# EAGLE board CT_schematic (EAGLE 7.6.0)

Size 100 x 80 mm. Coordinates in mm from the lower left corner, seen from the top.
Outline: 0,0 100,0 100,80 0,80 0,0
Copper layers (1*16): Top 0.035mm / dielectric 1.5mm / Bottom 0.035mm
Design rules "default": minimum track width 10mil, minimum drill 24mil, track to track 8mil, track to pad 8mil, pad to pad 8mil, via to via 8mil, smd to smd 8mil, copper to edge 40mil, drill to drill 8mil, minimum pad ring 10mil, minimum via ring 8mil, stop-mask expansion 4mil, vias tented up to drill 0mil, thermal gap 10mil

## Footprints (pad centres in the part's own frame; a part is rotated, then mirrored left to right if it is on the bottom)
C0603 = smd 0.8 x 0.8: 1 -0.762,0; 2 0.762,0
C0402 = smd 0.5 x 0.5: 1 -0.508,0; 2 0.508,0
C0805 = smd 1.2 x 1.3: 1 -1.016,0; 2 1.016,0
C1206 = smd 1.3 x 1.6: 1 -1.524,0; 2 1.524,0
C1210 = smd 1.2 x 2.5: 1 -1.524,0; 2 1.524,0
EXV-9H = smd 3.505 x 1.676: 1 -2.857,0; 2 2.857,0
L0603 = smd 0.8 x 0.8: 1 -0.762,0; 2 0.762,0
PJ-037B_PACKAGE = drill 3.7 square: 1 12,0 | drill 3.2 square: 2 6,0
R0603 = smd 0.8 x 0.8: 1 -0.762,0; 2 0.762,0
UFBGA169 = smd 0.35 x 0.35: A1 -3.9,3.9; A2 -3.25,3.9; A3 -2.6,3.9; A4 -1.95,3.9; A5 -1.3,3.9; A6 -0.65,3.9; A7 0,3.9; A8 0.65,3.9; A9 1.3,3.9; A10 1.95,3.9; A11 2.6,3.9; A12 3.25,3.9; A13 3.9,3.9; B1 -3.9,3.25; B2 -3.25,3.25; B3 -2.6,3.25; B4 -1.95,3.25; B5 -1.3,3.25; B6 -0.65,3.25; B7 0,3.25; B8 0.65,3.25; B9 1.3,3.25; B10 1.95,3.25; B11 2.6,3.25; B12 3.25,3.25; B13 3.9,3.25; C1 -3.9,2.6; C2 -3.25,2.6; C3 -2.6,2.6; C4 -1.95,2.6; C5 -1.3,2.6; C6 -0.65,2.6; C7 0,2.6; C8 0.65,2.6; C9 1.3,2.6; C10 1.95,2.6; C11 2.6,2.6; C12 3.25,2.6; C13 3.9,2.6; D1 -3.9,1.95; D2 -3.25,1.95; D3 -2.6,1.95; D4 -1.95,1.95; D5 -1.3,1.95; D6 -0.65,1.95; D7 0,1.95; D8 0.65,1.95; D9 1.3,1.95; D10 1.95,1.95; D11 2.6,1.95; D12 3.25,1.95; D13 3.9,1.95; E1 -3.9,1.3; E2 -3.25,1.3; E3 -2.6,1.3; E4 -1.95,1.3; E5 -1.3,1.3; E6 -0.65,1.3; E7 0,1.3; E8 0.65,1.3; E9 1.3,1.3; E10 1.95,1.3; E11 2.6,1.3; E12 3.25,1.3; E13 3.9,1.3; F1 -3.9,0.65; F2 -3.25,0.65; F3 -2.6,0.65; F4 -1.95,0.65; F5 -1.3,0.65; F6 -0.65,0.65; F7 0,0.65; F8 0.65,0.65; F9 1.3,0.65; F10 1.95,0.65; F11 2.6,0.65; F12 3.25,0.65; F13 3.9,0.65; G1 -3.9,0; G2 -3.25,0; G3 -2.6,0; G4 -1.95,0; G5 -1.3,0; G6 -0.65,0; G7 0,0; G8 0.65,0; G9 1.3,0; G10 1.95,0; G11 2.6,0; G12 3.25,0; G13 3.9,0; H1 -3.9,-0.65; H2 -3.25,-0.65; H3 -2.6,-0.65; H4 -1.95,-0.65; H5 -1.3,-0.65; H6 -0.65,-0.65; H7 0,-0.65; H8 0.65,-0.65; H9 1.3,-0.65; H10 1.95,-0.65; H11 2.6,-0.65; H12 3.25,-0.65; H13 3.9,-0.65; J1 -3.9,-1.3; J2 -3.25,-1.3; J3 -2.6,-1.3; J4 -1.95,-1.3; J5 -1.3,-1.3; J6 -0.65,-1.3; J7 0,-1.3; J8 0.65,-1.3; J9 1.3,-1.3; J10 1.95,-1.3; J11 2.6,-1.3; J12 3.25,-1.3; J13 3.9,-1.3; K1 -3.9,-1.95; K2 -3.25,-1.95; K3 -2.6,-1.95; K4 -1.95,-1.95; K5 -1.3,-1.95; K6 -0.65,-1.95; K7 0,-1.95; K8 0.65,-1.95; K9 1.3,-1.95; K10 1.95,-1.95; K11 2.6,-1.95; K12 3.25,-1.95; K13 3.9,-1.95; L1 -3.9,-2.6; L2 -3.25,-2.6; L3 -2.6,-2.6; L4 -1.95,-2.6; L5 -1.3,-2.6; L6 -0.65,-2.6; L7 0,-2.6; L8 0.65,-2.6; L9 1.3,-2.6; L10 1.95,-2.6; L11 2.6,-2.6; L12 3.25,-2.6; L13 3.9,-2.6; M1 -3.9,-3.25; M2 -3.25,-3.25; M3 -2.6,-3.25; M4 -1.95,-3.25; M5 -1.3,-3.25; M6 -0.65,-3.25; M7 0,-3.25; M8 0.65,-3.25; M9 1.3,-3.25; M10 1.95,-3.25; M11 2.6,-3.25; M12 3.25,-3.25; M13 3.9,-3.25; N1 -3.9,-3.9; N2 -3.25,-3.9; N3 -2.6,-3.9; N4 -1.95,-3.9; N5 -1.3,-3.9; N6 -0.65,-3.9; N7 0,-3.9; N8 0.65,-3.9; N9 1.3,-3.9; N10 1.95,-3.9; N11 2.6,-3.9; N12 3.25,-3.9; N13 3.9,-3.9
VFBGA48 = smd 0.35 x 0.35: A1 -1.875,2.625; A2 -1.125,2.625; A3 -0.375,2.625; A4 0.375,2.625; A5 1.125,2.625; A6 1.875,2.625; B1 -1.875,1.875; B2 -1.125,1.875; B3 -0.375,1.875; B4 0.375,1.875; B5 1.125,1.875; B6 1.875,1.875; C1 -1.875,1.125; C2 -1.125,1.125; C3 -0.375,1.125; C4 0.375,1.125; C5 1.125,1.125; C6 1.875,1.125; D1 -1.875,0.375; D2 -1.125,0.375; D3 -0.375,0.375; D4 0.375,0.375; D5 1.125,0.375; D6 1.875,0.375; E1 -1.875,-0.375; E2 -1.125,-0.375; E3 -0.375,-0.375; E4 0.375,-0.375; E5 1.125,-0.375; E6 1.875,-0.375; F1 -1.875,-1.125; F2 -1.125,-1.125; F3 -0.375,-1.125; F4 0.375,-1.125; F5 1.125,-1.125; F6 1.875,-1.125; G1 -1.875,-1.875; G2 -1.125,-1.875; G3 -0.375,-1.875; G4 0.375,-1.875; G5 1.125,-1.875; G6 1.875,-1.875; H1 -1.875,-2.625; H2 -1.125,-2.625; H3 -0.375,-2.625; H4 0.375,-2.625; H5 1.125,-2.625; H6 1.875,-2.625
SOT-23-8 = smd 0.4 x 1.2: 1 -0.975,-1.3; 2 -0.325,-1.3; 3 0.325,-1.3; 4 0.975,-1.3; 5 0.975,1.3; 6 0.325,1.3; 7 -0.325,1.3; 8 -0.975,1.3
182-009-MALE = drill 1.194 pad 1.524 octagon: 1 -5.537,10.923; 2 -2.769,10.923; 3 0,10.923; 4 2.769,10.923; 5 5.537,10.923; 6 -4.153,8.08; 7 -1.384,8.08; 8 1.384,8.08; 9 4.153,8.08 | hole 3.048: -12.446,9.501; 12.446,9.501
SOIC-8 = smd 1.6 x 0.6: 1 -2.7,1.905 | smd 1.55 x 0.6: 2 -2.7,0.635; 3 -2.7,-0.635; 4 -2.7,-1.905; 5 2.7,-1.905; 6 2.7,-0.635; 7 2.7,0.635; 8 2.7,1.905
MOLEX_47219-2001 = smd 0.8 x 1.5: 1 3.2,-2.1; 2 2.1,-2.1; 3 1,-2.1; 4 -0.1,-2.1; 5 -1.2,-2.1; 6 -2.3,-2.1; 7 -3.4,-2.1; 8 -4.5,-2.1 | smd 1.5 x 2.05: G1 6.875,-4.7; G2 6.875,3.6; G3 -6.875,3.6; G4 -6.875,-4.7
ASEK = smd 1.4 x 1: 1 -1.1,-0.8; 2 1.1,-0.8; 3 1.1,0.8; 4 -1.1,0.8
ASFL1 = smd 1.7 x 1.5: 1 -1.27,-1.1; 2 1.27,-1.1; 3 1.27,1.1; 4 -1.27,1.1
WSON-8 = smd 0.3 x 0.6: 1 -0.75,0; 2 0.05,0; 3 0.85,0; 4 1.65,0; 5 1.65,3.8; 6 0.85,3.8; 7 0.05,3.8; 8 -0.75,3.8 | smd 3 x 2.6: PAD 0.45,1.9
SON-6 = smd 0.55 x 0.3: 1 -0.355,0.5 | smd 0.52 x 0.3: 2 -0.37,0; 3 -0.37,-0.5; 4 0.37,-0.5; 5 0.37,0; 6 0.37,0.5
SW_4-1437565-2 = smd 1.4 x 2.1: 1 -2.23,4.55; 2 -2.23,-4.55; 3 2.23,4.55; 4 2.23,-4.55
LGM67K-G1J2-24-Z = smd 0.8 x 1.4: A -2,0; C 0,0
NC7SZ125M5X = smd 1.3 x 0.7: 1 -1.3,0.95; 2 -1.3,0; 3 -1.3,-0.95; 4 1.3,-0.95; 5 1.3,0.95
DUMMY_PACKAGE_186 = drill 0.3: 1 0,-1; 2 1.5,-1; 3 3,-1

## Placement (x,y rotation side)
C1  1e-06  [C0603]  -74.93,85.09 0 top  (outside the outline)
C2  1e-07  [C0603]  -78.74,85.09 0 top  (outside the outline)
C3  1e-07  [C0603]  -82.55,85.09 0 top  (outside the outline)
C4  1e-07  [C0603]  -15.24,90.17 0 top  (outside the outline)
C5  1e-07  [C0603]  -19.05,90.17 0 top  (outside the outline)
C6  1e-07  [C0603]  -22.86,90.17 0 top  (outside the outline)
C7  1e-07  [C0603]  -26.67,90.17 0 top  (outside the outline)
C8  1e-07  [C0603]  -30.48,90.17 0 top  (outside the outline)
C9  1e-07  [C0603]  -34.29,90.17 0 top  (outside the outline)
C10  1e-07  [C0603]  -38.1,90.17 0 top  (outside the outline)
C11  1e-07  [C0603]  -41.91,90.17 0 top  (outside the outline)
C12  1e-07  [C0603]  -45.72,90.17 0 top  (outside the outline)
C13  1e-07  [C0603]  -49.53,90.17 0 top  (outside the outline)
C14  1e-07  [C0603]  -53.34,90.17 0 top  (outside the outline)
C15  1e-07  [C0603]  -57.15,90.17 0 top  (outside the outline)
C16  1e-07  [C0603]  -60.96,90.17 0 top  (outside the outline)
C17  4.7e-06  [C0603]  -59.69,85.09 0 top  (outside the outline)
C18  2.2e-06  [C0603]  -63.5,85.09 0 top  (outside the outline)
C19  2.2e-06  [C0603]  -67.31,85.09 0 top  (outside the outline)
C20  1e-08  [C0603]  -64.77,90.17 0 top  (outside the outline)
C21  1e-06  [C0603]  -68.58,90.17 0 top  (outside the outline)
C22  1e-07  [C0603]  -72.39,90.17 0 top  (outside the outline)
C23  1e-07  [C0402]  -45.72,95.25 0 top  (outside the outline)
C24  2.2e-06  [C0603]  -71.12,85.09 0 top  (outside the outline)
C25  1e-07  [C0402]  -49.53,95.25 0 top  (outside the outline)
C26  1e-06  [C0603]  -76.2,90.17 0 top  (outside the outline)
C27  1e-06  [C0603]  -80.01,90.17 0 top  (outside the outline)
C28  1e-07  [C0402]  -53.34,95.25 0 top  (outside the outline)
C29  1e-05  [C0805]  -26.67,78.74 0 top  (outside the outline)
C30  1e-08  [C0402]  -57.15,95.25 0 top  (outside the outline)
C31  1e-08  [C0402]  -60.96,95.25 0 top  (outside the outline)
C32  1e-08  [C0402]  -64.77,95.25 0 top  (outside the outline)
C33  1e-05  [C1206]  -83.82,71.12 0 top  (outside the outline)
C34  1e-05  [C1210]  -71.12,71.12 0 top  (outside the outline)
C35  1e-06  [C0603]  -83.82,90.17 0 top  (outside the outline)
C36  1e-05  [C1210]  -77.47,71.12 0 top  (outside the outline)
C37  1e-07  [C0402]  -68.58,95.25 0 top  (outside the outline)
C38  0.0001  [EXV-9H]  -38.1,72.39 0 top  (outside the outline)
C39  0.0001  [EXV-9H]  -49.53,72.39 0 top  (outside the outline)
C40  1e-08  [C0402]  -72.39,95.25 0 top  (outside the outline)
F1  240.0  [L0603]  -15.24,95.25 0 top  (outside the outline)
J1  PJ-037B  [PJ-037B_PACKAGE]  -43.18,50.8 0 top  (outside the outline)
R2  1000.0  [R0603]  -19.05,95.25 0 top  (outside the outline)
R4  4700.0  [R0603]  -22.86,95.25 0 top  (outside the outline)
R5  10000.0  [R0603]  -20.32,85.09 0 top  (outside the outline)
R6  10000.0  [R0603]  -25.4,85.09 0 top  (outside the outline)
R7  10000.0  [R0603]  -30.48,85.09 0 top  (outside the outline)
R8  10000.0  [R0603]  -35.56,85.09 0 top  (outside the outline)
R9  10000.0  [R0603]  -40.64,85.09 0 top  (outside the outline)
R10  10000.0  [R0603]  -45.72,85.09 0 top  (outside the outline)
R11  120.0  [R0603]  -26.67,95.25 0 top  (outside the outline)
R12  120.0  [R0603]  -30.48,95.25 0 top  (outside the outline)
R13  100000.0  [R0603]  -31.75,78.74 0 top  (outside the outline)
R14  100000.0  [R0603]  -36.83,78.74 0 top  (outside the outline)
R15  100000.0  [R0603]  -41.91,78.74 0 top  (outside the outline)
R16  100000.0  [R0603]  -46.99,78.74 0 top  (outside the outline)
R17  100000.0  [R0603]  -52.07,78.74 0 top  (outside the outline)
R18  100000.0  [R0603]  -57.15,78.74 0 top  (outside the outline)
R19  100000.0  [R0603]  -62.23,78.74 0 top  (outside the outline)
R20  2231.0  [R0603]  -34.29,95.25 0 top  (outside the outline)
R21  1000.0  [R0603]  -38.1,95.25 0 top  (outside the outline)
R22  100000.0  [R0603]  -67.31,78.74 0 top  (outside the outline)
R23  300000.0  [R0603]  -72.39,78.74 0 top  (outside the outline)
R24  100000.0  [R0603]  -77.47,78.74 0 top  (outside the outline)
R25  10000.0  [R0603]  -50.8,85.09 0 top  (outside the outline)
R26  10000.0  [R0603]  -55.88,85.09 0 top  (outside the outline)
R27  9100.0  [R0603]  -41.91,95.25 0 top  (outside the outline)
R28  680000.0  [R0603]  -82.55,78.74 0 top  (outside the outline)
R29  120000.0  [R0603]  -15.24,85.09 0 top  (outside the outline)
U1  STM32F469AEH6  [UFBGA169]  -22.86,50.8 0 top  (outside the outline)
U2  CY62147GE30-45BVXI  [VFBGA48]  -60.96,50.8 0 top  (outside the outline)
U3  MAX3051EKA+T  [SOT-23-8]  -15.24,78.74 0 top  (outside the outline)
U4  182-009-113R531  [182-009-MALE]  -36.83,6.35 0 top  (outside the outline)
U5  MCP2562-E/SN  [SOIC-8]  -21.59,63.5 0 top  (outside the outline)
U6  182-009-113R531  [182-009-MALE]  -36.83,27.94 0 top  (outside the outline)
U7  0472192001  [MOLEX_47219-2001]  -62.23,30.48 0 top  (outside the outline)
U8  ASEK-32.768KHz-ECST  [ASEK]  -29.21,72.39 0 top  (outside the outline)
U9  ASFL1-25MHZ-NCS  [ASFL1]  -77.47,62.23 0 top  (outside the outline)
U10  LP3878SDX-ADJ/NOPB  [WSON-8]  -43.18,60.96 0 top  (outside the outline)
U11  LP2951ACSDX/NOPB  [WSON-8]  -60.96,60.96 0 top  (outside the outline)
U12  TPS3895ADRYR  [SON-6]  -81.28,93.98 0 top  (outside the outline)
U13  4-1437565-2  [SW_4-1437565-2]  -78.74,49.53 0 top  (outside the outline)
U14  Q65110A2395  [LGM67K-G1J2-24-Z]  -59.69,71.12 0 top  (outside the outline)
U15  nc7sz125m5x  [NC7SZ125M5X]  -20.32,78.74 0 top  (outside the outline)
U16  Dummy  [DUMMY_PACKAGE_186]  -78.74,95.25 0 top  (outside the outline)

## Library data of the parts
C1-C40 F1 J1 R2 R4-R29 U1-U16 = circuit_tree

## Nets
CLK_U1_E1: U1.E1 U8.3
CLK_U1_G2: U1.G2 U9.3
GND: C1.2 C2.2 C3.2 C4.2 C5.2 C6.2 C7.2 C8.2 C9.2 C10.2 C11.2 C12.2 C13.2 C14.2 C15.2 C16.2 C17.2 C18.2 C19.2 C20.2 C21.2 C22.2 C23.2 C24.2 C25.2 C26.2 C27.2 C28.2 C29.2 C30.2 C31.2 C32.2 C33.2 C34.2 C35.2 C36.2 C37.2 C38.2 C39.2 C40.2 J1.2 R2.2 R21.2 R24.2 R27.2 R29.2 U1.D11 U1.E3 U1.F5 U1.F8 U1.G7 U1.G9 U1.H11 U1.J1 U1.J2 U1.J6 U1.J7 U1.J10 U1.K11 U1.M9 U2.D1 U2.E6 U3.2 U3.8 U4.5 U5.2 U5.8 U6.5 U7.6 U7.G1 U7.G2 U7.G3 U7.G4 U8.2 U9.2 U10.3 U10.PAD U11.3 U11.4 U11.PAD U12.2 U14.C U15.1 U15.3 U16.1
NET_U1_A5: R6.1 U1.A5
NET_U1_C3: R5.1 U1.C3
NET_U1_D12: C19.1 U1.D12
NET_U1_H2: R4.1 U1.H2 U15.4
NET_U1_J3: C20.1 C21.1 F1.1 U1.J3
NET_U1_J11: U1.J11
NET_U1_K12: U1.K12
NET_U1_L5: R7.1 U1.L5
NET_U1_N9: C18.1 U1.N9
NET_U1_N12: U14.A
NET_U1_N13: U13.3 U13.4
NET_U3_6: R11.2 U3.6
NET_U4_2: R11.2 U3.6 U4.2
NET_U4_3: R11.1 U3.7 U4.3
NET_U5_6: R12.2 U5.6
NET_U6_2: R12.2 U5.6 U6.2
NET_U6_3: R12.1 U5.7 U6.3
NET_U10_1: C32.1 U10.1
NET_U10_6: R20.2 R21.1 U10.6
NET_U10_8: R19.1 U10.8
NET_U11_5: R22.1 U11.5
NET_U11_7: R23.2 R24.1 U11.7
NET_U12_1: R26.1 R27.1 U12.1
NET_U12_3: R28.2 R29.1 U12.3
NET_U12_4: R25.1 U12.4 U15.2
NET_U13_1: R2.1 U13.1 U13.2
PROC_CAN1_RX: U1.A13 U5.4
PROC_CAN1_TX: U1.A12 U5.1
PROC_CAN2_RX: U1.D5 U3.4
PROC_CAN2_TX: U1.C5 U3.1
PROC_FMC_A0: U1.F3 U2.A3
PROC_FMC_A1: U1.G3 U2.A4
PROC_FMC_A2: U1.G5 U2.A5
PROC_FMC_A3: U1.H4 U2.B3
PROC_FMC_A4: U1.L4 U2.B4
PROC_FMC_A5: U1.H3 U2.C3
PROC_FMC_A6: U1.N5 U2.C4
PROC_FMC_A7: U1.M4 U2.D4
PROC_FMC_A8: U1.H5 U2.H2
PROC_FMC_A9: U1.M6 U2.H3
PROC_FMC_A10: U1.N6 U2.H4
PROC_FMC_A11: U1.M7 U2.H5
PROC_FMC_A12: U1.F13 U2.G3
PROC_FMC_A13: U1.F12 U2.G4
PROC_FMC_A14: U1.E13 U2.F3
PROC_FMC_A15: U1.E12 U2.F4
PROC_FMC_A16: U1.M11 U2.E4
PROC_FMC_A17: U1.M13 U2.D3
PROC_FMC_D0: U1.L12 U2.B6
PROC_FMC_D1: U1.L13 U2.C5
PROC_FMC_D2: U1.C9 U2.C6
PROC_FMC_D3: U1.C7 U2.D5
PROC_FMC_D4: U1.N7 U2.E5
PROC_FMC_D5: U1.G6 U2.F5
PROC_FMC_D6: U1.H6 U2.F6
PROC_FMC_D7: U1.H7 U2.G6
PROC_FMC_D8: U1.K7 U2.B1
PROC_FMC_D9: U1.L7 U2.C1
PROC_FMC_D10: U1.J8 U2.C2
PROC_FMC_D11: U1.K8 U2.D2
PROC_FMC_D12: U1.L8 U2.E2
PROC_FMC_D13: U1.L10 U2.F2
PROC_FMC_D14: U1.M10 U2.F1
PROC_FMC_D15: U1.L11 U2.G1
PROC_FMC_NBL0: U1.A4 U2.A1
PROC_FMC_NE2: R9.1 U1.E6 U2.B5
PROC_FMC_NOE: R8.1 U1.C6 U2.A2
PROC_FMC_NWE: R10.1 U1.B7 U2.G5
PROC_SDIO_CK: R14.1 U1.A9 U7.5
PROC_SDIO_CMD: R13.1 U1.B8 U7.3
PROC_SDIO_D0: R15.1 U1.E10 U7.7
PROC_SDIO_D1: R16.1 U1.G10 U7.8
PROC_SDIO_D2: R17.1 U1.C10 U7.1
PROC_SDIO_D3: R18.1 U1.B9 U7.2
PROC_TIM1_CH1: U1.D8 U16.3
PROC_TIM1_CH2: U1.E8 U16.2
VCC_S1_9V7: C33.1 C35.1 C38.1 C39.1 J1.1 R19.2 U10.4 U11.8
VCC_TIER1_3V3: C1.1 C2.1 C3.1 C4.1 C5.1 C6.1 C7.1 C8.1 C9.1 C10.1 C11.1 C12.1 C13.1 C14.1 C15.1 C16.1 C17.1 C22.1 C23.1 C24.1 C25.1 C27.1 C28.1 C29.1 C30.1 C31.1 C34.1 C37.1 C40.1 F1.2 R4.2 R5.2 R6.2 R7.2 R8.2 R9.2 R10.2 R13.2 R14.2 R15.2 R16.2 R17.2 R18.2 R20.1 R25.2 R26.2 R28.1 U1.D3 U1.D10 U1.E5 U1.F4 U1.F7 U1.G8 U1.G11 U1.J4 U1.K6 U1.K10 U1.K13 U1.L6 U1.L9 U2.D6 U2.E1 U3.3 U5.5 U7.4 U8.4 U9.4 U10.5 U12.6 U15.5
VCC_TIER1_5V0: C26.1 C36.1 R22.2 R23.1 U5.3 U11.1

## Tracks (layer width: path | path; a pad name or v marks a point on that pad's centre or on a via)
CLK_U1_E1  (1 unrouted)
CLK_U1_G2  (1 unrouted)
GND  (84 unrouted)
NET_U1_A5  (1 unrouted)
NET_U1_C3  (1 unrouted)
NET_U1_D12  (1 unrouted)
NET_U1_H2  (2 unrouted)
NET_U1_J3  (3 unrouted)
NET_U1_L5  (1 unrouted)
NET_U1_N9  (1 unrouted)
NET_U1_N13  (1 unrouted)
NET_U3_6  (1 unrouted)
NET_U4_2  (2 unrouted)
NET_U4_3  (2 unrouted)
NET_U5_6  (1 unrouted)
NET_U6_2  (2 unrouted)
NET_U6_3  (2 unrouted)
NET_U10_1  (1 unrouted)
NET_U10_6  (2 unrouted)
NET_U10_8  (1 unrouted)
NET_U11_5  (1 unrouted)
NET_U11_7  (2 unrouted)
NET_U12_1  (2 unrouted)
NET_U12_3  (2 unrouted)
NET_U12_4  (2 unrouted)
NET_U13_1  (2 unrouted)
PROC_CAN1_RX  (1 unrouted)
PROC_CAN1_TX  (1 unrouted)
PROC_CAN2_RX  (1 unrouted)
PROC_CAN2_TX  (1 unrouted)
PROC_FMC_A0  (1 unrouted)
PROC_FMC_A1  (1 unrouted)
PROC_FMC_A2  (1 unrouted)
PROC_FMC_A3  (1 unrouted)
PROC_FMC_A4  (1 unrouted)
PROC_FMC_A5  (1 unrouted)
PROC_FMC_A6  (1 unrouted)
PROC_FMC_A7  (1 unrouted)
PROC_FMC_A8  (1 unrouted)
PROC_FMC_A9  (1 unrouted)
PROC_FMC_A10  (1 unrouted)
PROC_FMC_A11  (1 unrouted)
PROC_FMC_A12  (1 unrouted)
PROC_FMC_A13  (1 unrouted)
PROC_FMC_A14  (1 unrouted)
PROC_FMC_A15  (1 unrouted)
PROC_FMC_A16  (1 unrouted)
PROC_FMC_A17  (1 unrouted)
PROC_FMC_D0  (1 unrouted)
PROC_FMC_D1  (1 unrouted)
PROC_FMC_D2  (1 unrouted)
PROC_FMC_D3  (1 unrouted)
PROC_FMC_D4  (1 unrouted)
PROC_FMC_D5  (1 unrouted)
PROC_FMC_D6  (1 unrouted)
PROC_FMC_D7  (1 unrouted)
PROC_FMC_D8  (1 unrouted)
PROC_FMC_D9  (1 unrouted)
PROC_FMC_D10  (1 unrouted)
PROC_FMC_D11  (1 unrouted)
PROC_FMC_D12  (1 unrouted)
PROC_FMC_D13  (1 unrouted)
PROC_FMC_D14  (1 unrouted)
PROC_FMC_D15  (1 unrouted)
PROC_FMC_NBL0  (1 unrouted)
PROC_FMC_NE2  (2 unrouted)
PROC_FMC_NOE  (2 unrouted)
PROC_FMC_NWE  (2 unrouted)
PROC_SDIO_CK  (2 unrouted)
PROC_SDIO_CMD  (2 unrouted)
PROC_SDIO_D0  (2 unrouted)
PROC_SDIO_D1  (2 unrouted)
PROC_SDIO_D2  (2 unrouted)
PROC_SDIO_D3  (2 unrouted)
PROC_TIM1_CH1  (1 unrouted)
PROC_TIM1_CH2  (1 unrouted)
VCC_S1_9V7  (7 unrouted)
VCC_TIER1_3V3  (69 unrouted)
VCC_TIER1_5V0  (5 unrouted)